# Altium PCB Sensei Control Board.PcbDoc (part 1 of 2)
Units mil, origin at the board's own origin, x right, y up, seen from the top; angles counter-clockwise.
Board outline 2310 x 2685 mil, 4 copper layers (Top Layer, Int1 (GND), Int2 (PWR), Bottom Layer), stack 61.811 mil thick; 49 components, 37 nets, 153 pads, 35 vias.
Unrouted connection lines stored in the file: 1.
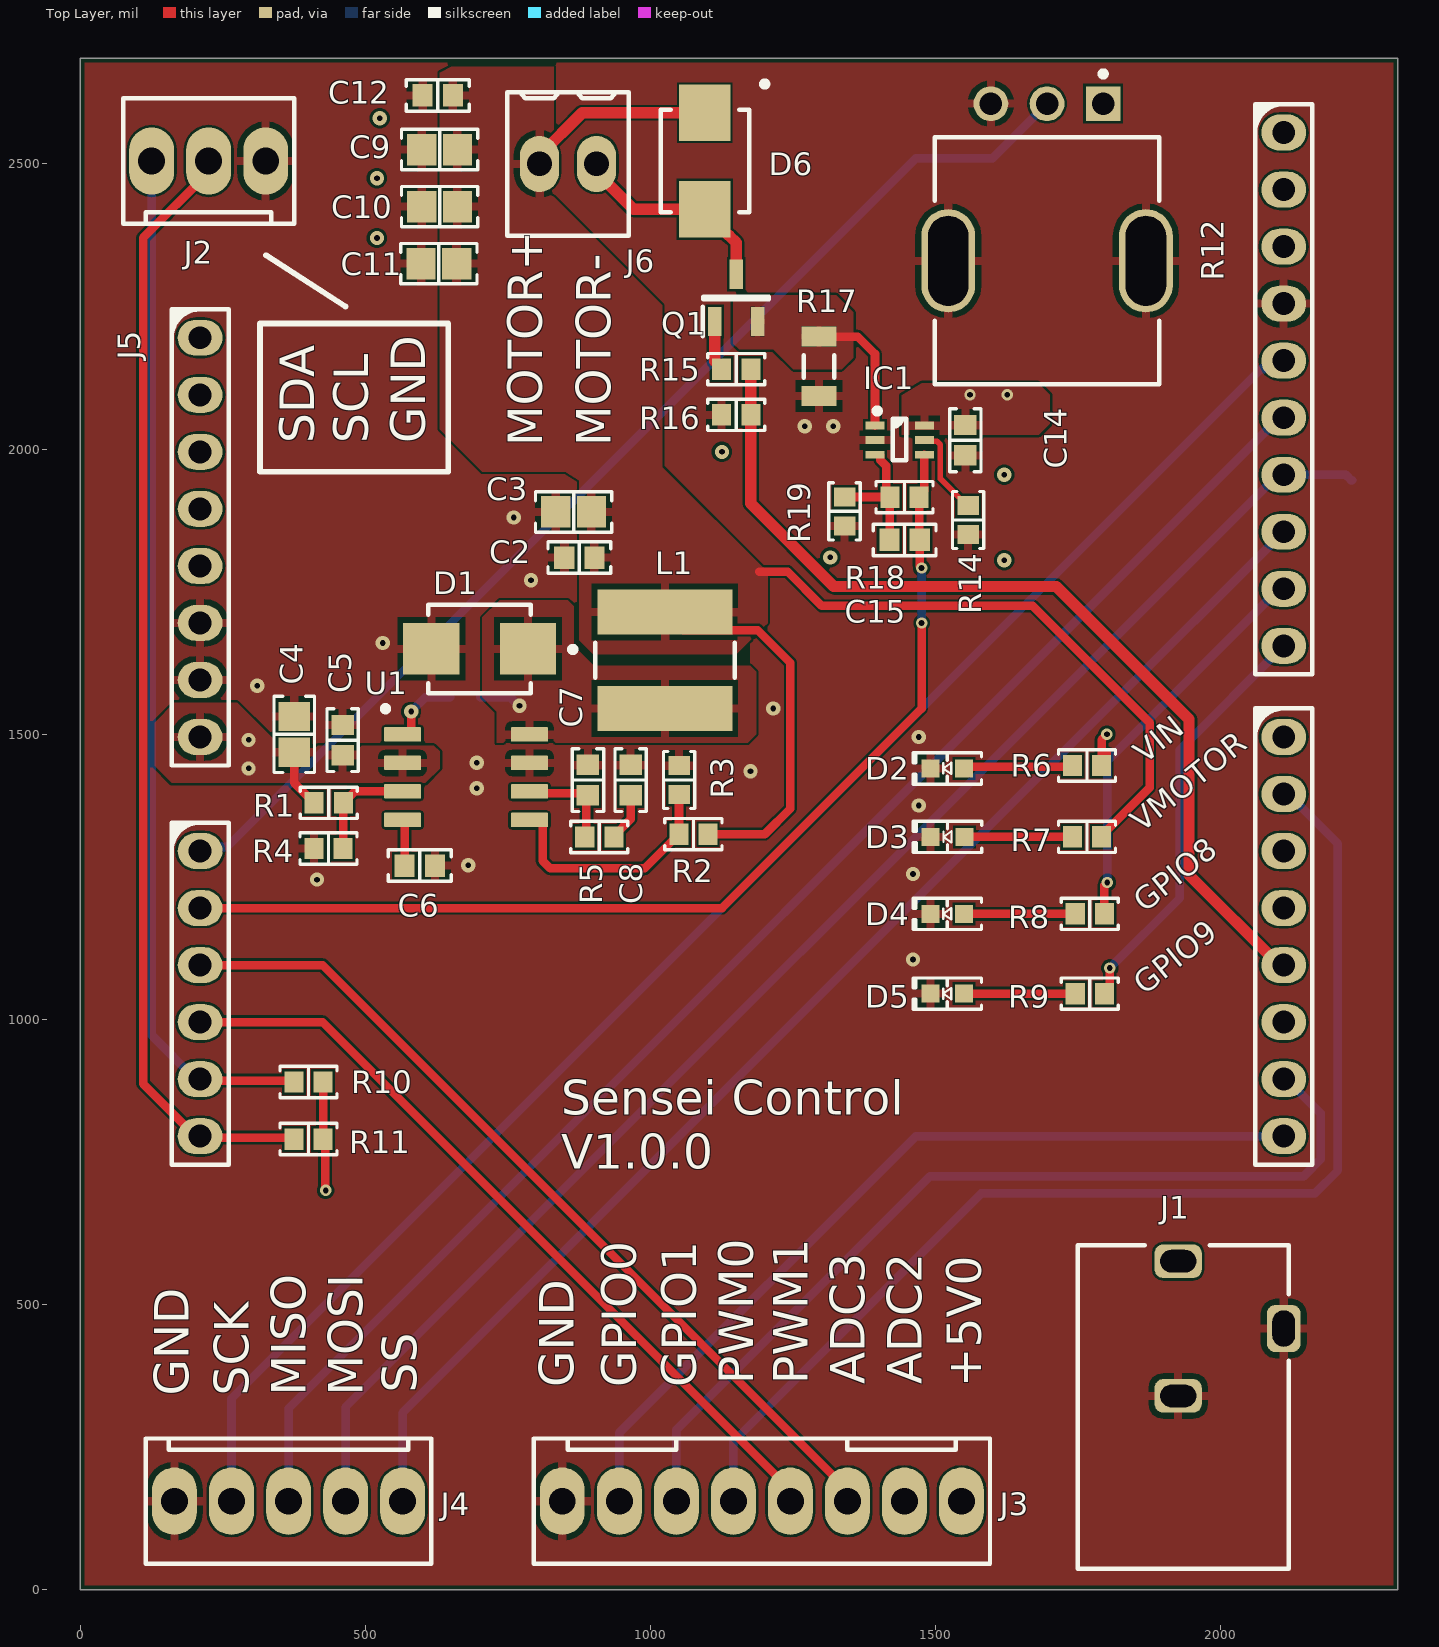
[diagram p0: Top Layer view]
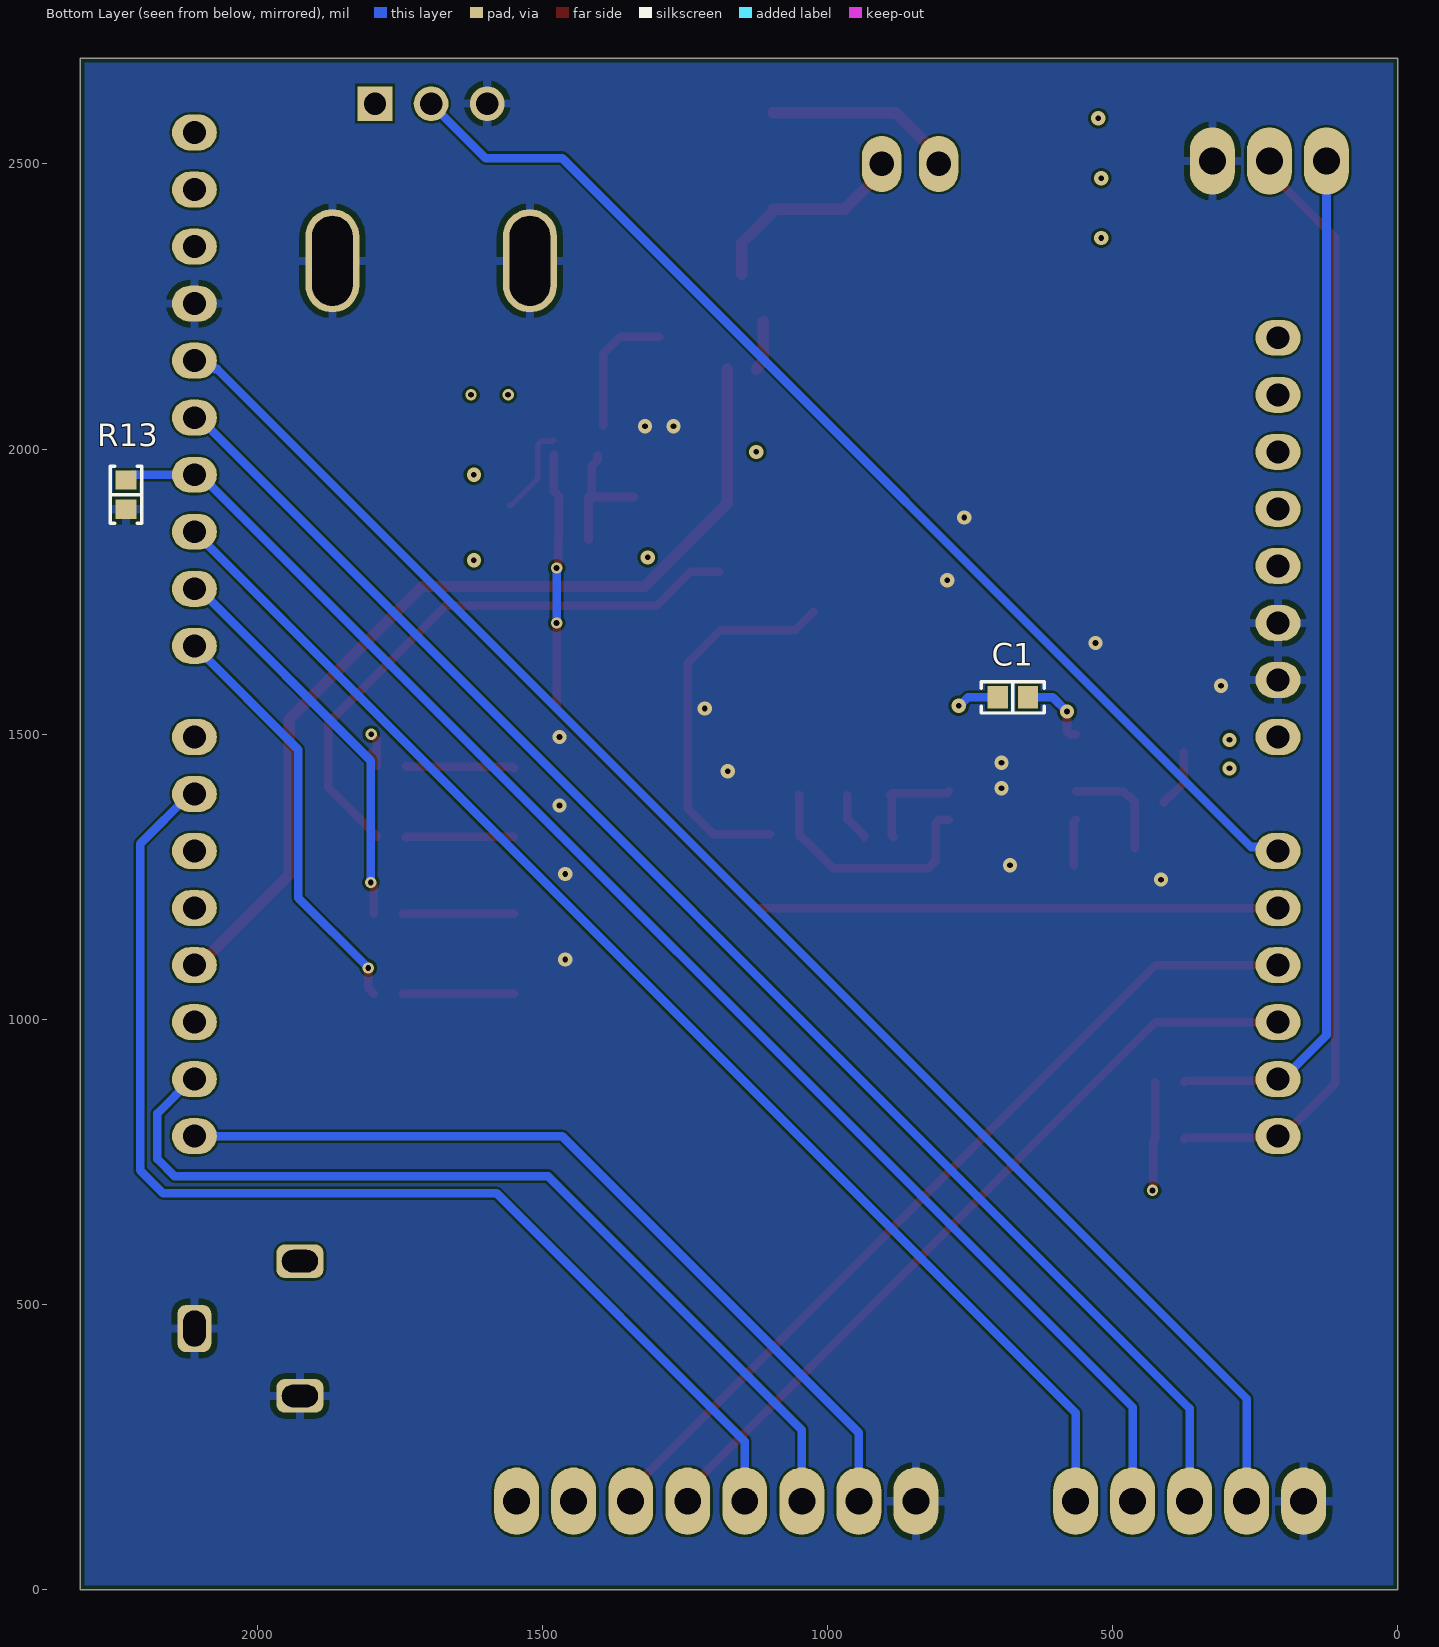
[diagram p1: Bottom Layer view, seen from below]
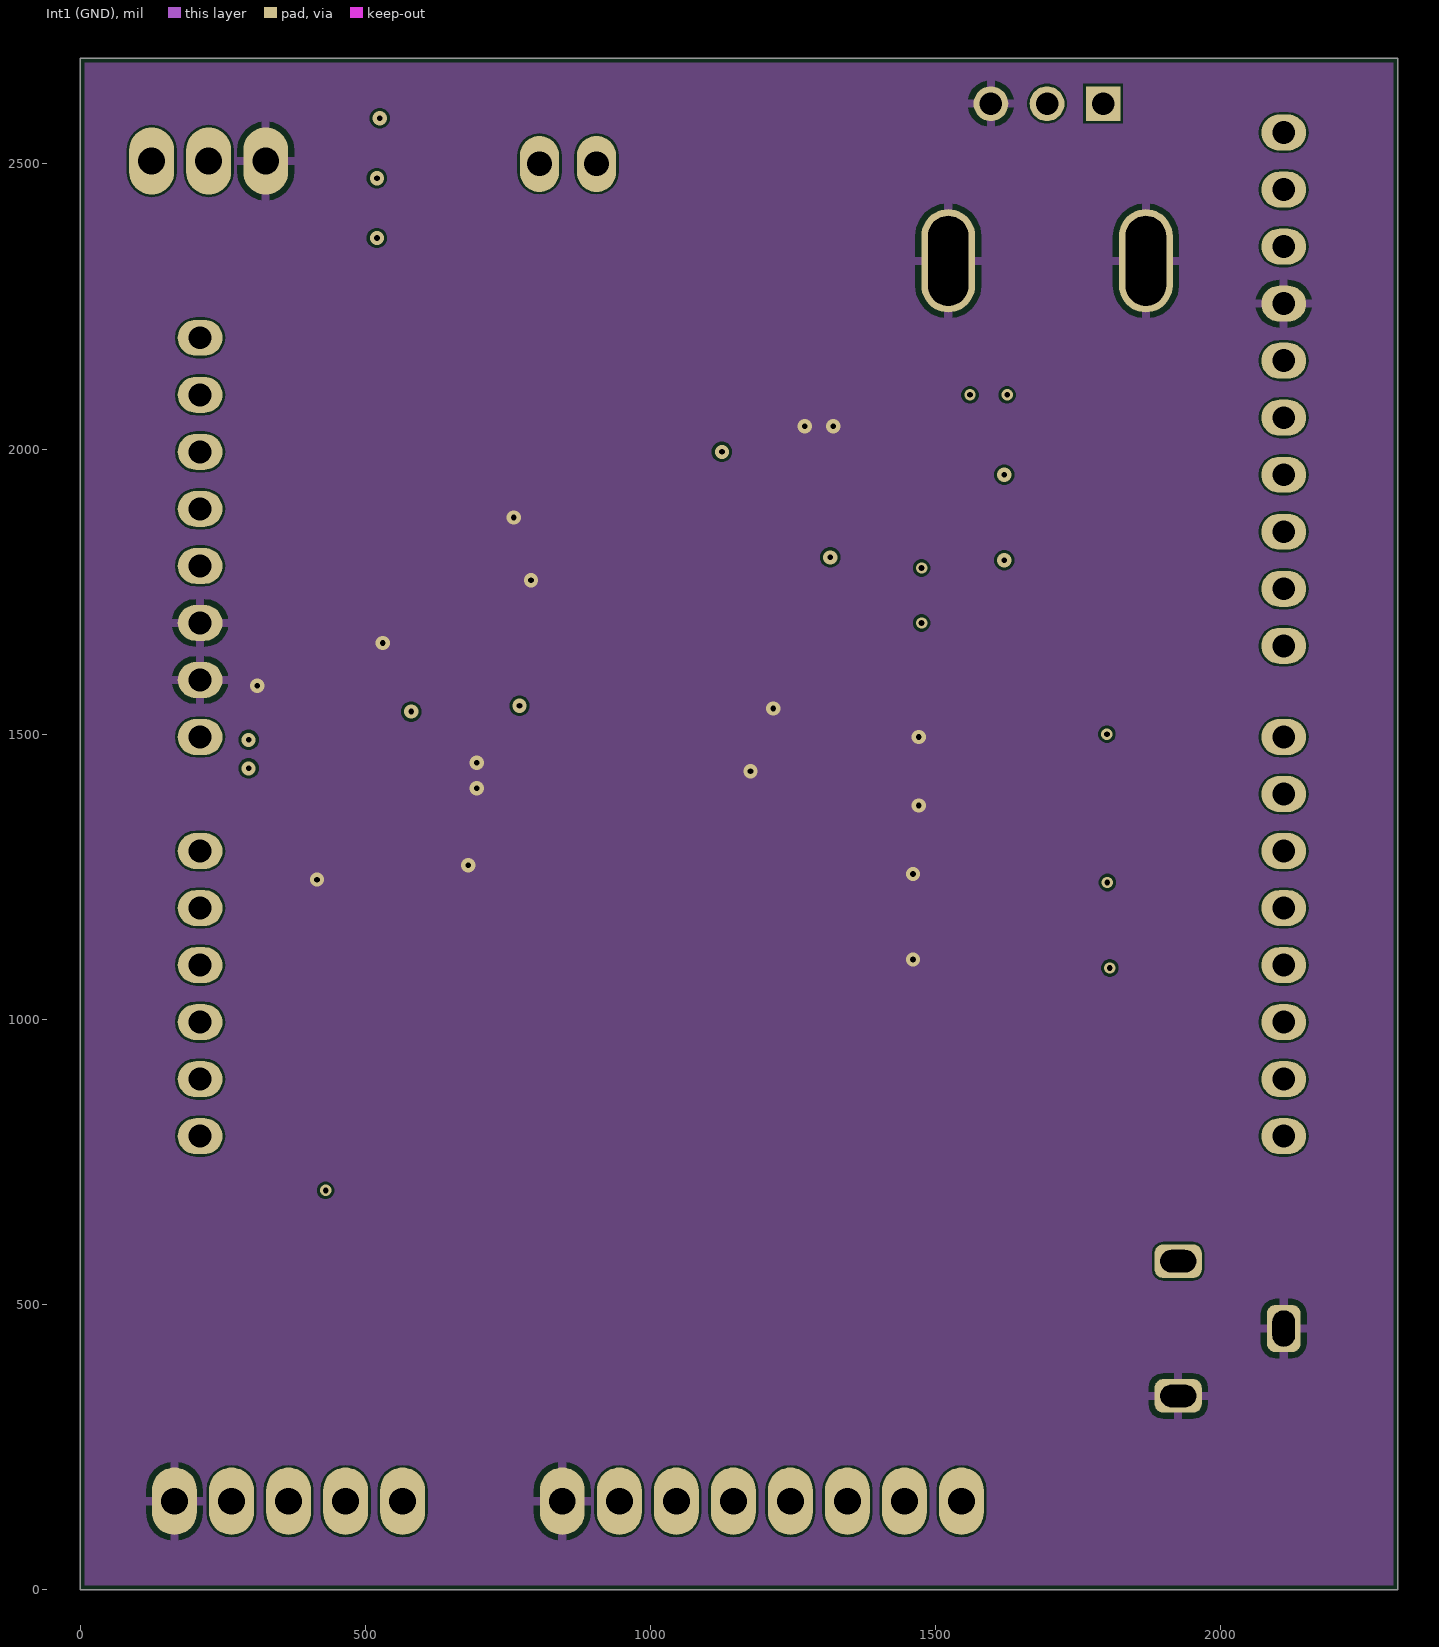
[diagram p2: Int1 (GND)]
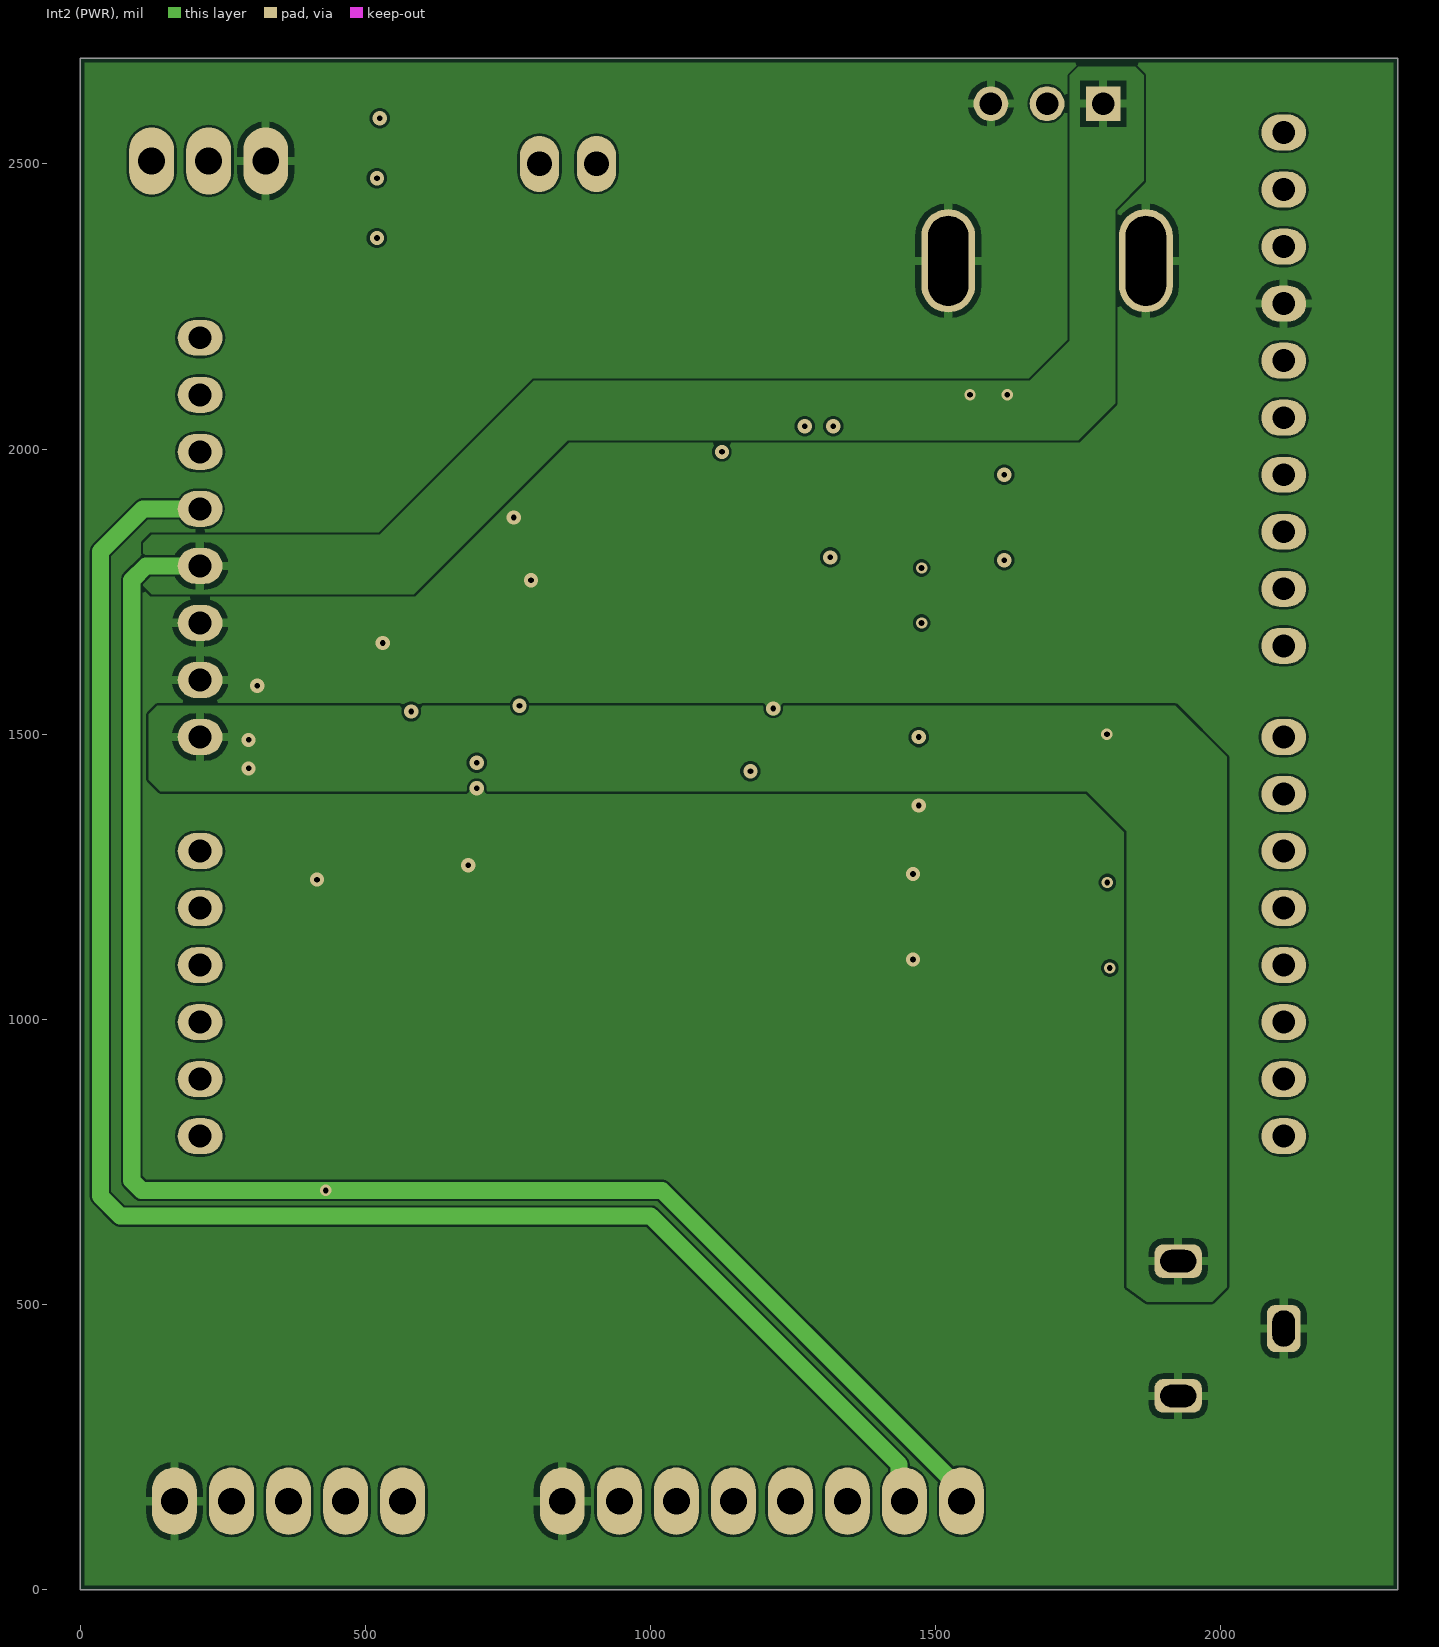
[diagram p3: Int2 (PWR)]

## Layer stack, top to bottom
Top Solder: solder mask 0.5, SM-001, Dk 3.8
Top Layer: signal copper 1.378
Dielectric 1: prepreg 3.937, 2313, Dk 4.05
Int1 (GND): signal copper 0.689
Dielectric 3: core 49.803, FR-4, Dk 4.5
Int2 (PWR): signal copper 0.689
Dielectric 5: prepreg 3.937, 2313, Dk 4.05
Bottom Layer: signal copper 1.378
Bottom Solder: solder mask 0.5, SM-001, Dk 3.8

## Board outline
0,0 2310,0 2310,2685 0,2685

## Design rules (kind name [scope] priority, off if disabled: settings)
BoardOutlineClearance [All] p1: gap=7.87 ignorepadtopadclearanceinfootprint=FALSE
Clearance [All] p1: gap=4 ignorepadtopadclearanceinfootprint=FALSE except(5: Arc-Via Track-Via SMDPad-Via THPad-Via Via-Via Via-Fill Via-Poly Via-Region Via-Text; 9.84: Arc-Hole Track-Hole SMDPad-Hole THPad-Hole Via-Hole Fill-Hole Poly-Hole Region-Hole Text-Hole)
ComponentClearance [All] p1: gap=4 collisioncheckmode=3 verticalgap=4 showdistances=TRUE
DiffPairsRouting [All] p1: maxlimit=4 minlimit=4 mostfreqgap=4 toplayer_minwidth=4 toplayer_maxwidth=71497.94 toplayer_prefwidth=4 midlayer1_minwidth=4 midlayer1_maxwidth=71497.94 midlayer1_prefwidth=4 midlayer2_minwidth=4 midlayer2_maxwidth=71497.94 midlayer2_prefwidth=4 bottomlayer_minwidth=4 bottomlayer_maxwidth=71497.94 bottomlayer_prefwidth=4 maxuncoupledlength=500
Height [All] p1: minheight=0 maxheight=71497.94 prefheight=500
HoleSize [All] p1: absolutevalues=TRUE maxlimit=248.03 minlimit=7.87 maxpercent=80.000 minpercent=20.000
HoleToHoleClearance [All] p1: gap=9.84 allowstackedmicrovias=FALSE
MinimumAnnularRing [All] p1: minimumring=3
MinimumSolderMaskSliver [All] p1: minsoldermaskwidth=0
PlaneClearance [All] p1: clearance=6
PlaneConnect [All] p1: pad.planeconnectstyle=Relief pad.reliefexpansion=11.81 pad.reliefentries=4 pad.reliefconductorwidth=4 pad.reliefairgap=4 via.planeconnectstyle=Direct via.reliefexpansion=11.81 via.reliefentries=4 via.reliefconductorwidth=5 via.reliefairgap=5
PolygonConnect PolygonConnectPowerPads [InNetClass('Power')] p1: thpad.connectstyle=Relief thpad.reliefconductorwidth=15 thpad.reliefentries=4 thpad.polygonreliefangle="90 Angle" thpad.airgapwidth=10 smdpad.connectstyle=Relief smdpad.reliefconductorwidth=15 smdpad.reliefentries=4 smdpad.polygonreliefangle="90 Angle" smdpad.airgapwidth=10 via.connectstyle=Direct via.reliefconductorwidth=10 via.reliefentries=4 via.polygonreliefangle="90 Angle" via.airgapwidth=10
RoutingVias "Power Vias" [InNetClass('Power')] p1: holewidth=10 width=20 viastyle="Through Hole" minholewidth=8 minwidth=20 maxholewidth=15 maxwidth=30
RoutingVias RoutingVias_1 [All] p2: holewidth=7 width=15 viastyle="Through Hole" minholewidth=4 minwidth=8 maxholewidth=10 maxwidth=20
SilkToSilkClearance [All] p1: silktosilkclearance=0
SilkToSolderMaskClearance [IsPad] p1: minsilkscreentomaskgap=2.9 clearancetoexposedcopper=TRUE
SolderMaskExpansion [All] p1: expansion=2.95 istentingtop=FALSE
Width Width_1 [All] p1: maxlimit=30 minlimit=10 preferedwidth=10
Width "Power Routes" [InNetClass('Power')] p2: maxlimit=20 minlimit=4 preferedwidth=15 midlayer1_prefwidth=4 midlayer2_prefwidth=4 minimp=50.000000 maximp=50.000000 favimp=50.000000
20 further rules are at their usual default settings.

## Classes and differential pairs
net class Power: 3V3 5V0 BOOT GND V_MOTOR V_SW VIN
component class Power: C1 C2 C3 C4 C5 C6 C7 C8 D1 J1 L1 R1 R2 R3 R4 R5 U1
component class MotorDriver: C9 C10 C11 C12 C14 C15 D6 IC1 J6 Q1 R14 R15 R16 R17 R18 R19
component class IO: D2 D3 D4 D5 J2 J3 J4 J5 P2 P3 P4 R6 R7 R8 R9 R10 R11 R12 R13

## Components (designator, comment, footprint, x,y, rotation, side; value= is the part's Value field where it differs from the comment)
C1 "0.1µF" "CAP 0603_1608" 675,1564.65 r180 bottom
C2 "0.1µF" "CAP 0603_1608" 875,1809.65 r0 top
C3 "10µF" "CAP 0805_2012" 865,1889.65 r0 top
C4 "22µF" "CAP 0805_2012" 375,1499.65 r270 top
C5 "0.1µF" "CAP 0603_1608" 460,1489.65 r270 top
C6 "8200pF" "CAP 0603_1608" 595,1269.65 r180 top
C7 "6800pF" "CAP 0603_1608" 890,1419.65 r270 top
C8 "2200pF" "CAP 0603_1608" 965,1419.65 r270 top
C9 "10µF" "CAP 0805_2012" 630,2525 r0 top
C10 "10µF" "CAP 0805_2012" 630,2425 r0 top
C11 "1µF" "CAP 0805_2012" 628.5,2325 r0 top
C12 "0.1µF" "CAP 0603_1608" 626.57,2620 r0 top
C14 "0.1µF" "CAP 0603_1608" 1551.69,2015.59 r90 top
C15 "100pF" "CAP 0603_1608" 1445.12,1840.59 r0 top
D1 "B240-13-F" FP-SMB-MFG 700,1649.65 r180 top value=200pF
D2 "Red" "LED 0603_1608 RED" 1520,1440 r180 top
D3 "Red" "LED 0603_1608 RED" 1520.47,1320 r180 top
D4 "RED" "LED 0603_1608 RED" 1520,1185 r180 top value=Red
D5 "Red" "LED 0603_1608 RED" 1520,1045 r180 top
D6 "B240-13-F" FP-SMB-MFG 1095,2505 r270 top value=200pF
IC1 "LMV601MG/NOPB" "TI SC70-6 DCK" 1436.69,2015.59 r0 top
J1 "PJ-102AH" "CUI PJ-102AH" 1925,320 r180 top
J2 "0022272031" "MOLEX KK 0022272031" 225,2505 r0 top locked
J3 "0022272081" "MOLEX KK 0022272081" 1195,155 r180 top locked
J4 "0022272051" "MOLEX KK 0022272051" 365,155 r180 top locked
J5 "920-0088-01" "SCHMARTBOARD - 920-0088-01" 1160,1675 r0 top locked
J6 "282834-2" "TE 282834-2" 855,2500 r0 top locked
L1 "SRN6045-150M" FP-SRN6045-MFG 1025,1629.65 r90 top
Q1 "IRLML6246TRPBF" SOT95P237X112-3N 1150,2265 r90 top
R1 "169 kΩ" "RES 0603_1608" 435.59,1379.65 r180 top value="169 kOhms"
R2 "10.2 kΩ" "RES 0603_1608" 1075,1324.65 r0 top value="10.2 kOhms"
R3 "1.58 kΩ" "RES 0603_1608" 1050,1419.65 r270 top value="1.58 kOhms"
R4 "51 kΩ" "RES 0603_1608" 435,1299.65 r0 top value="51 kOhms"
R5 "30.9 kΩ" "RES 0603_1608" 910,1319.65 r180 top value="30.9 kOhms"
R6 "820 Ω" "RES 0603_1608" 1765,1445 r180 top value="820 Ohms"
R7 "390 Ω" "RES 0603_1608" 1765,1320 r180 top value="390 Ohms"
R8 "330 Ω" "RES 0603_1608" 1770,1185 r180 top value="330 Ohms"
R9 "330 Ω" "RES 0603_1608" 1770,1045 r180 top value="330 Ohms"
R10 "10 kΩ" "RES 0603_1608" 400,890 r180 top value="10 kOhms"
R11 "10 kΩ" "RES 0603_1608" 400,790 r180 top value="10 kOhms"
R12 "PTV09A-4020U-B103" FP-PTV09A-4-MFG 1695,2330 r180 top value=10kΩ
R13 "100 kΩ" "RES 0603_1608" 2230,1920 r270 bottom value="100 kOhms"
R14 "0 Ω" "RES 0603_1608" 1556.69,1875.59 r270 top value="0 Ohms"
R15 "10 Ω" "RES 0603_1608" 1150,2140 r180 top value="10 Ohms"
R16 "100 kΩ" "RES 0603_1608" 1150,2060 r0 top value="100 kOhms"
R17 "100mΩ" RESC3216X70X50LL05T20 1295,2145 r90 top
R18 "360 kΩ" "RES 0603_1608" 1445.12,1915.59 r0 top value="360 kOhms"
R19 "4.3 kΩ" "RES 0603_1608" 1340.12,1890.59 r270 top value="4.3 kOhms"
U1 "TPS54232DR" D0008A_M 676.22,1424.65 r0 top

## Footprints (in the part's own frame and the unit in brackets; to place one, negate y for a bottom-side part, rotate by r counter-clockwise, add the part's x,y. Pads: shape width x height; smd on the part's side, far side on the other; paste and mask are expansions set on the pad)
"CAP 0603_1608" [mm] "Chip Capacitor, 2-Leads, Body 1.60x0.80mm, IPC Medium Density"
  rect 0.9x1 smd: 1(-0.675,0) 2(0.675,0)
  silkscreen extent -1.4,-0.7 1.4,0.7, body extent -0.8,-0.41 0.8,0.41, height 0.82
"CAP 0805_2012" [mm] "Chip Capacitor, 2-Leads, Body 2.00x1.20mm, IPC Medium Density"
  rect 1.3x1.4 smd: 1(-0.8,0) 2(0.8,0)
  silkscreen extent -1.7,-0.9 1.7,0.9, body extent -1,-0.64 1,0.64, height 1.26
"CUI PJ-102AH" [mm] "DC Barrel Jack W/ Switch 2.0x5.5"
  rrect50% 2.1x1.5 hole 1 slot 1.6 at 0 deg: 1(0,-6.5) 2(0,-0.5)
  rrect50% 1.5x2.1 hole 1 slot 1.6 at 90 deg: 3(-4.7,-3.5)
  silkscreen extent -4.92,-7.2 4.47,7.2, body extent -4.92,-7.2 4.47,7.2, height 11
D0008A_M [mm] "SOIC, 8-Leads, Body 5x4mm, Pitch 1.27mm, IPC Low Density"
  rrect15% 1.65x0.65 smd: 1(-2.825,1.905) 2(-2.825,0.635) 3(-2.825,-0.635) 4(-2.825,-1.905) 5(2.825,-1.905) 6(2.825,-0.635) 7(2.825,0.635) 8(2.825,1.905)
  silkscreen extent -3.71,2.92 -3.46,3.17, body extent -3,-2.45 3,2.45, height 1.63
FP-PTV09A-4-MFG [mm]
  rect 1.55x1.55 hole 1 paste-1000 mask+0: 1(-2.5,-7)
  round 1.55 hole 1 paste-1000 mask+0: 2(0,-7) 3(2.5,-7)
  rrect100% 2.4x4.6 hole 4 slot 1.8 at 0 deg paste-1000 mask+0: 4(-4.4,0) 5(4.4,0)
  silkscreen extent -5,-8.45 5,5.5, body extent -5.8,-7.88 5.8,5.6, height 0.25
FP-SMB-MFG [mm]
  rect 2.5x2.3 smd paste+0 mask+0: 1(-2.15,0) 2(2.15,0)
  silkscreen extent -4.28,-1.97 2.28,1.97, body extent -3.5,-2.07 3.5,2.07, height 0.25
FP-SRN6045-MFG [mm]
  rect 2x6 smd paste+0 mask+0: 1(-2.15,0) 2(2.15,0)
  silkscreen extent -0.77,-3.1 0.77,3.1, body extent -3.25,-3.2 3.25,3.2, height 0.25
"LED 0603_1608 RED" [mm] "Chip Diode, 2-Leads, Body 1.60x0.80mm, IPC Medium Density"
  rect 0.8x0.8 smd: 1(-0.75,0) 2(0.75,0)
  silkscreen extent -1.52,-0.7 1.52,0.7, body extent -0.8,-0.4 0.8,0.4, height 0.53
"MOLEX KK 0022272031" [mm]
  oval 2x3 hole 1.2: 1(-2.54,0) 2(0,0) 3(2.54,0)
  silkscreen extent -3.81,-2.79 3.81,2.79, body extent -3.81,-2.9 3.81,2.9, height 11.7
"MOLEX KK 0022272051" [mm]
  oval 2x3 hole 1.2: 1(-5.08,0) 2(-2.54,0) 3(0,0) 4(2.54,0) 5(5.08,0)
  silkscreen extent -6.35,-2.79 6.35,2.79, body extent -6.35,-2.9 6.35,2.9, height 11.7
"MOLEX KK 0022272081" [mm]
  oval 2x3 hole 1.2: 1(-8.89,0) 2(-6.35,0) 3(-3.81,0) 4(-1.27,0) 5(1.27,0) 6(3.81,0) 7(6.35,0) 8(8.89,0)
  silkscreen extent -10.16,-2.79 10.16,2.79, body extent -10.16,-2.9 10.16,2.9, height 11.7
"RES 0603_1608" [mm] "Chip Resistor, 2-Leads, Body 1.60x0.80mm, IPC Medium Density"
  rect 0.85x0.95 smd: 1(-0.65,0) 2(0.65,0)
  silkscreen extent -1.27,-0.7 1.27,0.7, body extent -0.8,-0.4 0.8,0.4, height 0.45
RESC3216X70X50LL05T20 [mm] "Chip Resistor, 2-Leads, Body 3.20x1.60mm, IPC High Density"
  rect 0.9x1.55 smd: 1(-1.325,0) 2(1.325,0)
  silkscreen extent -0.5,-0.67 0.5,0.67, body extent -1.63,-0.82 1.62,0.82, height 0.7
"SCHMARTBOARD - 920-0088-01" [mm] "Arduino pin header set"
  oval 2x1.6 hole 1.02: 1(-24.13,13.21) 2(-24.13,10.67) 3(-24.13,8.13) 4(-24.13,5.59) 5(-24.13,3.05) 6(-24.13,0.51) 7(-24.13,-2.03) 8(-24.13,-4.57) 9(-24.13,-9.65) 10(-24.13,-12.19) 11(-24.13,-14.73) 12(-24.13,-17.27) 13(-24.13,-19.81) 14(-24.13,-22.35) 15(24.13,-22.35) 16(24.13,-19.81) 17(24.13,-17.27) 18(24.13,-14.73) 19(24.13,-12.19) 20(24.13,-9.65) 21(24.13,-7.11) 22(24.13,-4.57) 23(24.13,-0.51) 24(24.13,2.03) 25(24.13,4.57) 26(24.13,7.11) 27(24.13,9.65) 28(24.13,12.19) 29(24.13,14.73) 30(24.13,17.27) 31(24.13,19.81) 32(24.13,22.35)
  silkscreen extent -25.4,-23.62 25.4,23.62, body extent -25.4,-23.62 25.4,23.62, height 8.5
SOT95P237X112-3N [mm]
  rect 1.3x0.6 smd: 1(-1.05,0.95) 2(-1.05,-0.95) 3(1.05,0)
  silkscreen extent -1.7,-1.46 0.05,1.5, body extent -1.18,-1.46 1.18,1.46, height 1.12
"TE 282834-2" [mm]
  oval 1.75x2.5 hole 1.1: 1(-1.27,0) 2(1.27,0)
  silkscreen extent -2.7,-3.2 2.7,3.2, body extent -2.77,-3.25 2.77,3.25, height 10
"TI SC70-6 DCK" [mm] "SC70, 6-Leads, Body 2.00x2.10mm, Pitch 0.65mm, IPC Medium Density"
  rect 0.85x0.35 smd: 1(-1.1,0.65) 2(-1.1,0) 3(-1.1,-0.65) 4(1.1,-0.65) 5(1.1,0) 6(1.1,0.65)
  silkscreen extent -1.12,-0.9 0.3,1.42, body extent -1.06,-1 1.06,1, height 1.1

## Part data
C1 C2 C5 C12 C14: library part 06033C104JAT2A, "CAP CER 0.1UF 25V X7R 0603", Device Package="0603 (1608 Metric)", Manufacturer="AVX Corporation", Operating Temperature="-55°C ~ 125°C", Supplier Part Number 1=478-3713-1-ND, Temperature Coefficient=X7R, Tolerance=±5%, Voltage - Rated=25V, Applications="General Purpose", Capacitance=0.1µF, ComponentLink1Description=Datasheet, ComponentLink1URL=http://datasheets.avx.com/X7RDielectric.pdf, ComponentLink2Description="DigiKey Link", ComponentLink2URL=http://digikey.com/product-detail/en/avx-corporation/06033C104JAT2A/478-3713-1-ND/1116411, LastUpdated="2/3/2020 5:05:47 PM", Lifecycle Status=Active, Minimum Order=1, Mounting Type="Surface Mount, MLCC", Package / Case="0603 (1608 Metric)", Packaging=TapeAndReel, Part Number=06033C104JAT2A, Part Status=Active, Price=0.07, Series=-, Size / Dimension="0.063\" L x 0.032\" W (1.60mm x 0.81mm)", Supplier 1=DigiKey, Thickness (Max)="0.035\" (0.90mm)"
C3 C9 C10: library part 08053D106KAT2A, "CAP CER 10UF 25V X5R 0805", Device Package="0805 (2012 Metric)", Manufacturer="AVX Corporation", Operating Temperature="-55°C ~ 85°C", Supplier Part Number 1=478-7436-1-ND, Temperature Coefficient=X5R, Tolerance=±10%, Voltage - Rated=25V, Applications="General Purpose", Capacitance=10µF, ComponentLink1Description=Datasheet, ComponentLink1URL=http://datasheets.avx.com/cx5r.pdf, ComponentLink2Description="DigiKey Link", ComponentLink2URL=http://digikey.com/product-detail/en/avx-corporation/08053D106KAT2A/478-7436-1-ND/3660337, LastUpdated="2/3/2020 5:07:41 PM", Lifecycle Status=Active, Minimum Order=1, Mounting Type="Surface Mount, MLCC", Package / Case="0805 (2012 Metric)", Packaging=TapeAndReel, Part Number=08053D106KAT2A, Part Status=Active, Price=0.13, Series=-, Size / Dimension="0.079\" L x 0.049\" W (2.00mm x 1.25mm)", Supplier 1=DigiKey, Thickness (Max)="0.051\" (1.30mm)"
C4: library part C2012X5R1E226M125AC, "CAP CER 22UF 25V X5R 0805", Device Package="0805 (2012 Metric)", Manufacturer="TDK Corporation", Operating Temperature="-55°C ~ 85°C", Supplier Part Number 1=445-9112-1-ND, Temperature Coefficient=X5R, Tolerance=±20%, Voltage - Rated=25V, Applications="General Purpose", Capacitance=22µF, ComponentLink1Description=Datasheet, ComponentLink1URL=https://product.tdk.com/info/en/catalog/datasheets/mlcc_commercial_general_en.pdf?ref_disty=digikey, ComponentLink2Description="DigiKey Link", ComponentLink2URL=http://digikey.com/product-detail/en/tdk-corporation/C2012X5R1E226M125AC/445-9112-1-ND/3661660, Features="Low ESL", LastUpdated="2/3/2020 5:06:58 PM", Lifecycle Status=Active, Minimum Order=1, Mounting Type="Surface Mount, MLCC", Package / Case="0805 (2012 Metric)", Packaging=TapeAndReel, Part Number=C2012X5R1E226M125AC, Part Status=Active, Price=1.18, Series=C, Size / Dimension="0.079\" L x 0.049\" W (2.00mm x 1.25mm)", Supplier 1=DigiKey, Thickness (Max)="0.057\" (1.45mm)"
C6: library part 06035C822KAT2A, "CAP CER 8200PF 50V X7R 0603", Device Package="0603 (1608 Metric)", Manufacturer="AVX Corporation", Operating Temperature="-55°C ~ 125°C", Supplier Part Number 1=478-1226-1-ND, Temperature Coefficient=X7R, Tolerance=±10%, Voltage - Rated=50V, Applications="General Purpose", Capacitance=8200pF, ComponentLink1Description=Datasheet, ComponentLink1URL=http://datasheets.avx.com/X7RDielectric.pdf, ComponentLink2Description="DigiKey Link", ComponentLink2URL=http://digikey.com/product-detail/en/avx-corporation/06035C822KAT2A/478-1226-1-ND/564258, LastUpdated="2/3/2020 5:05:05 PM", Lifecycle Status=Active, Minimum Order=1, Mounting Type="Surface Mount, MLCC", Package / Case="0603 (1608 Metric)", Packaging=TapeAndReel, Part Number=06035C822KAT2A, Part Status=Active, Price=0.02, Series=-, Size / Dimension="0.063\" L x 0.032\" W (1.60mm x 0.81mm)", Supplier 1=DigiKey, Thickness (Max)="0.035\" (0.90mm)"
C7: library part 06033C682JAT2A, "CAP CER 6800PF 25V X7R 0603", Device Package="0603 (1608 Metric)", Manufacturer="AVX Corporation", Operating Temperature="-55°C ~ 125°C", Supplier Part Number 1=478-12687-1-ND, Temperature Coefficient=X7R, Tolerance=±5%, Voltage - Rated=25V, Applications="General Purpose", Capacitance=6800pF, ComponentLink1Description=Datasheet, ComponentLink1URL=http://datasheets.avx.com/X7RDielectric.pdf, ComponentLink2Description="DigiKey Link", ComponentLink2URL=http://digikey.com/product-detail/en/avx-corporation/06033C682JAT2A/478-12687-1-ND/9949222, LastUpdated="2/3/2020 5:06:06 PM", Lifecycle Status=Active, Minimum Order=1, Mounting Type="Surface Mount, MLCC", Package / Case="0603 (1608 Metric)", Packaging=TapeAndReel, Part Number=06033C682JAT2A, Part Status=Active, Price=0.05, Series=-, Size / Dimension="0.063\" L x 0.032\" W (1.60mm x 0.81mm)", Supplier 1=DigiKey, Thickness (Max)="0.035\" (0.90mm)"
C8: library part 06033C222JAT2A, "CAP CER 2200PF 25V X7R 0603", Device Package="0603 (1608 Metric)", Manufacturer="AVX Corporation", Operating Temperature="-55°C ~ 125°C", Supplier Part Number 1=478-12683-1-ND, Temperature Coefficient=X7R, Tolerance=±5%, Voltage - Rated=25V, Applications="General Purpose", Capacitance=2200pF, ComponentLink1Description=Datasheet, ComponentLink1URL=http://datasheets.avx.com/X7RDielectric.pdf, ComponentLink2Description="DigiKey Link", ComponentLink2URL=http://digikey.com/product-detail/en/avx-corporation/06033C222JAT2A/478-12683-1-ND/9949218, LastUpdated="2/3/2020 5:05:43 PM", Lifecycle Status=Active, Minimum Order=1, Mounting Type="Surface Mount, MLCC", Package / Case="0603 (1608 Metric)", Packaging=TapeAndReel, Part Number=06033C222JAT2A, Part Status=Active, Price=0.01, Series=-, Size / Dimension="0.063\" L x 0.032\" W (1.60mm x 0.81mm)", Supplier 1=DigiKey, Thickness (Max)="0.035\" (0.90mm)"
C11: library part 08053C105JAT2A, "CAP CER 1UF 25V X7R 0805", Device Package="0805 (2012 Metric)", Manufacturer="AVX Corporation", Operating Temperature="-55°C ~ 125°C", Supplier Part Number 1=478-10487-1-ND, Temperature Coefficient=X7R, Tolerance=±5%, Voltage - Rated=25V, Applications="General Purpose", Capacitance=1µF, ComponentLink1Description=Datasheet, ComponentLink1URL=http://datasheets.avx.com/X7RDielectric.pdf, ComponentLink2Description="DigiKey Link", ComponentLink2URL=http://digikey.com/product-detail/en/avx-corporation/08053C105JAT2A/478-10487-1-ND/6797628, LastUpdated="2/3/2020 5:07:31 PM", Lifecycle Status=Active, Minimum Order=1, Mounting Type="Surface Mount, MLCC", Package / Case="0805 (2012 Metric)", Packaging=TapeAndReel, Part Number=08053C105JAT2A, Part Status=Active, Price=0.09, Series=-, Size / Dimension="0.079\" L x 0.049\" W (2.01mm x 1.25mm)", Supplier 1=DigiKey, Thickness (Max)="0.037\" (0.94mm)"
C15: library part 06033A101KAT2A, "CAP CER 100PF 25V C0G/NP0 0603", Device Package="0603 (1608 Metric)", Manufacturer="AVX Corporation", Operating Temperature="-55°C ~ 125°C", Supplier Part Number 1=478-7895-1-ND, Temperature Coefficient="C0G, NP0", Tolerance=±10%, Voltage - Rated=25V, Applications="General Purpose", Capacitance=100pF, ComponentLink1Description=Datasheet, ComponentLink1URL=http://datasheets.avx.com/C0GNP0-Dielectric.pdf, ComponentLink2Description="DigiKey Link", ComponentLink2URL=http://digikey.com/product-detail/en/avx-corporation/06033A101KAT2A/478-7895-1-ND/3881518, LastUpdated="2/3/2020 5:05:19 PM", Lifecycle Status=Active, Minimum Order=1, Mounting Type="Surface Mount, MLCC", Package / Case="0603 (1608 Metric)", Packaging=TapeAndReel, Part Number=06033A101KAT2A, Part Status=Active, Price=0.04, Series=-, Size / Dimension="0.063\" L x 0.032\" W (1.60mm x 0.81mm)", Supplier 1=DigiKey, Thickness (Max)="0.035\" (0.90mm)"
D1 D6: library part CMP-12790-000044-1, "DIODE SCHOTTKY 40V 2A SMB", Capacitance=200pF, Forward Current=2A, Manufacturer="Diodes Inc.", Max Junction Temp=+150°C, Max Repetitive Reverse Voltage=40V, Max Surge Forward Current=50A, Package=SMB, Peak Reverse Current=0.5mA, Temperature="-65°C to +150°C", Temperature Range Low=-65°C, Automotive=No, Category=Diode, ComponentLink2Description=Datasheet, ComponentLink2URL=https://www.diodes.com/assets/Datasheets/ds13004.pdf, Device Class L1="Discrete Semiconductors", Device Class L2=Diodes, Device Class L3="Schottky Diodes", Digikey Description="DIODE SCHOTTKY 40V 2A SMB", Footprint Url=https://www.diodes.com/assets/Package-Files/SMB.pdf, Height=2.5mm, Lead Free=Yes, Manufacturer Part Number=B240-13-F, Mouser Description="Schottky Diodes & Rectifiers 40V 2A", Octopart=https://octopart.com/b240-13-f-diodes+inc.-325780, Reverse Voltage=40V, RoHS=TRUE, Standoff Height=0.05mm, Temperature Range High=+150°C
D2 D3 D5: library part 150060SS55040, "LED RED DIFFUSED 0603 SMD", Current - Test=20mA, Device Package="0603 (1608 Metric)", Lens Color=0.50mm, Manufacturer="Würth Elektronik", Millicandela Rating=70mcd, Supplier Part Number 1=732-12016-1-ND, Voltage - Forward (Vf) (Typ)=2V, Color=Red, ComponentLink1Description=Datasheet, ComponentLink1URL=https://www.we-online.de/web/en/index.php/download/media/07_electronic_components/download_center_1/application_notes_berichte/ano002_leds___the_future_of_horticultural_lighting/ANO002b_EN_LEDs_The_Future_of_Horticultural_Lighting.pdf, ComponentLink2Description="DigiKey Link", ComponentLink2URL=http://digikey.com/product-detail/en/w-rth-elektronik/150060SS55040/732-12016-1-ND/8557226, Configuration=Standard, Height (Max)=0.50mm, LastUpdated="2/3/2020 5:16:30 PM", Lens Size="1.00mm x 0.80mm", Lens Style="Rectangle with Flat Top", Lens Transparency=Diffused, Lifecycle Status=Active, Minimum Order=1, Mounting Type="Surface Mount", Package / Case="0603 (1608 Metric)", Packaging=TapeAndReel, Part Number=150060SS55040, Part Status=Active, Price=0.10, Series=WL-SMDC, Size / Dimension="1.60mm L x 0.80mm W", Supplier 1=DigiKey, Supplier Device Package="0603 (1608 Metric)", Viewing Angle=140°, Wavelength - Dominant=630nm, Wavelength - Peak=645nm
D4: library part 150060SS55040, "LED RED DIFFUSED 0603 SMD", Color=Red, Current - Test=20mA, Device Package="0603 (1608 Metric)", Lens Color=0.50mm, Manufacturer="Würth Elektronik", Millicandela Rating=70mcd, Supplier Part Number 1=732-12016-1-ND, Voltage - Forward (Vf) (Typ)=2V, ComponentLink1Description=Datasheet, ComponentLink1URL=https://www.we-online.de/web/en/index.php/download/media/07_electronic_components/download_center_1/application_notes_berichte/ano002_leds___the_future_of_horticultural_lighting/ANO002b_EN_LEDs_The_Future_of_Horticultural_Lighting.pdf, ComponentLink2Description="DigiKey Link", ComponentLink2URL=http://digikey.com/product-detail/en/w-rth-elektronik/150060SS55040/732-12016-1-ND/8557226, Configuration=Standard, Height (Max)=0.50mm, LastUpdated="2/3/2020 5:16:30 PM", Lens Size="1.00mm x 0.80mm", Lens Style="Rectangle with Flat Top", Lens Transparency=Diffused, Lifecycle Status=Active, Minimum Order=1, Mounting Type="Surface Mount", Package / Case="0603 (1608 Metric)", Packaging=TapeAndReel, Part Number=150060SS55040, Part Status=Active, Price=0.10, Series=WL-SMDC, Size / Dimension="1.60mm L x 0.80mm W", Supplier 1=DigiKey, Supplier Device Package="0603 (1608 Metric)", Viewing Angle=140°, Wavelength - Dominant=630nm, Wavelength - Peak=645nm
IC1: "IC OPAMP GP 1 CIRCUIT SC70-6", Current - Input Bias=0.02pA, Current - Output / Channel=113mA, Current - Supply=107µA, Device Package="6-TSSOP, SC-88, SOT-363", Manufacturer="Texas Instruments", Operating Temperature="-40°C ~ 125°C", Supplier Device Package=SC-70-6, Supplier Part Number 1=296-39050-1-ND, Voltage - Input Offset=250µV, Voltage - Supply, Single/Dual (±)="2.7V ~ 5.5V", Amplifier Type="General Purpose", ComponentLink1Description=Datasheet, ComponentLink1URL=http://www.ti.com/general/docs/suppproductinfo.tsp?distId=10&gotoUrl=http%3A%2F%2Fwww.ti.com%2Flit%2Fgpn%2Flmv601, ComponentLink2Description="DigiKey Link", ComponentLink2URL=http://digikey.com/product-detail/en/texas-instruments/LMV601MG-NOPB/296-39050-1-ND/5143087, Gain Bandwidth Product=1MHz, LastUpdated="2/3/2020 5:02:27 PM", Lifecycle Status=Active, Minimum Order=1, Mounting Type="Surface Mount", Number of Circuits=1, Output Type=Rail-to-Rail, Package / Case="6-TSSOP, SC-88, SOT-363", Packaging=ReReel, Part Number=LMV601MG/NOPB, Part Status=Active, Price=0.00, Series=-, Slew Rate=1V/µs, Supplier 1=DigiKey
J1: "CONN PWR JACK 2X5.5MM SOLDER", Current Rating (Amps)=5A, Manufacturer="CUI Devices", Material Flammability Rating="UL94 V-0", Supplier Part Number 1=CP-102AH-ND, Voltage - Rated=24VDC, Actual Diameter="0.079\" (2.00mm ID), 0.256\" (6.50mm OD)", ComponentLink1Description=Datasheet, ComponentLink1URL=https://www.cuidevices.com/product/resource/digikeypdf/pj-102ah.pdf, ComponentLink2Description="DigiKey Link", ComponentLink2URL=//digikey.com/product-detail/en/cui-devices/PJ-102AH/CP-102AH-ND/408448, Connector Type=Jack, Gender=Male, Industry Recognized Mating Diameter="2.00mm ID (0.079\"), 5.50mm OD (0.217\")", Internal Switch(s)="Single Switch, Normally Closed", LastUpdated="2/3/2020 5:11:42 PM", Lifecycle Status=0, Mating Length/Depth="0.354\" (9.00mm)", Minimum Order=1, Mounting Type="Through Hole, Right Angle", Number of Positions/Contacts="2 Conductors, 3 Contacts", Packaging=Tray, Part Number=PJ-102AH, Part Status=Active, Price=0.76, Series=-, Shielding=Unshielded, Supplier 1=DigiKey, Termination=Solder
J2: "CONN HEADER VERT 3POS 2.54MM", Insulation Color=Natural, Manufacturer=Molex, Material Flammability Rating="UL94 V-0", Supplier Part Number 1=WM4112-ND, ComponentLink1Description=Datasheet, ComponentLink1URL=https://www.molex.com/pdm_docs/sd/022272031_sd.pdf, ComponentLink2Description="DigiKey Link", ComponentLink2URL=http://digikey.com/product-detail/en/molex/0022272031/WM4112-ND/1130578, Connector Type=Header, Contact Finish - Mating=Tin, Contact Finish - Post=Tin, Contact Finish Thickness - Mating="100.0µin (2.54µm)", Contact Length - Mating="0.295\" (7.49mm)", Contact Length - Post="0.140\" (3.56mm)", Contact Material=Brass, Contact Shape=Square, Contact Type="Male Pin", Fastening Type="Friction Lock", Insulation Height="0.461\" (11.70mm)", Insulation Material="Polyamide (PA), Nylon", LastUpdated="2/3/2020 5:11:43 PM", Lifecycle Status=Active, Minimum Order=1, Mounting Type="Through Hole", Number of Positions=3, Number of Positions Loaded=All, Number of Rows=1, Overall Contact Length="0.560\" (14.22mm)", Packaging=Bulk, Part Number=0022272031, Part Status=Active, Pitch - Mating="0.100\" (2.54mm)", Price=0.37, Series="KK 6410", Shrouding="Shrouded - 1 Wall", Style="Board to Cable/Wire", Supplier 1=DigiKey, Termination=Solder
J3: "CONN HEADER VERT 8POS 2.54MM", Insulation Color=Natural, Manufacturer=Molex, Material Flammability Rating="UL94 V-0", Supplier Part Number 1=WM4117-ND, ComponentLink1Description=Datasheet, ComponentLink1URL=https://www.molex.com/pdm_docs/sd/022272081_sd.pdf, ComponentLink2Description="DigiKey Link", ComponentLink2URL=http://digikey.com/product-detail/en/molex/0022272081/WM4117-ND/1130583, Connector Type=Header, Contact Finish - Mating=Tin, Contact Finish - Post=Tin, Contact Finish Thickness - Mating="100.0µin (2.54µm)", Contact Length - Mating="0.295\" (7.49mm)", Contact Length - Post="0.140\" (3.56mm)", Contact Material=Brass, Contact Shape=Square, Contact Type="Male Pin", Fastening Type="Friction Lock", Insulation Height="0.461\" (11.70mm)", Insulation Material="Polyamide (PA), Nylon", LastUpdated="2/3/2020 5:11:43 PM", Lifecycle Status=Active, Minimum Order=1, Mounting Type="Through Hole", Number of Positions=8, Number of Positions Loaded=All, Number of Rows=1, Overall Contact Length="0.560\" (14.22mm)", Packaging=Bulk, Part Number=0022272081, Part Status=Active, Pitch - Mating="0.100\" (2.54mm)", Price=0.60, Series="KK 6410", Shrouding="Shrouded - 1 Wall", Style="Board to Cable/Wire", Supplier 1=DigiKey, Termination=Solder
J4: "CONN HEADER VERT 5POS 2.54MM", Insulation Color=Natural, Manufacturer=Molex, Material Flammability Rating="UL94 V-0", Supplier Part Number 1=WM4114-ND, ComponentLink1Description=Datasheet, ComponentLink1URL=https://www.molex.com/pdm_docs/sd/022272051_sd.pdf, ComponentLink2Description="DigiKey Link", ComponentLink2URL=http://digikey.com/product-detail/en/molex/0022272051/WM4114-ND/1130580, Connector Type=Header, Contact Finish - Mating=Tin, Contact Finish - Post=Tin, Contact Finish Thickness - Mating="100.0µin (2.54µm)", Contact Length - Mating="0.295\" (7.49mm)", Contact Length - Post="0.140\" (3.56mm)", Contact Material=Brass, Contact Shape=Square, Contact Type="Male Pin", Fastening Type="Friction Lock", Insulation Height="0.461\" (11.70mm)", Insulation Material="Polyamide (PA), Nylon", LastUpdated="2/3/2020 5:11:43 PM", Lifecycle Status=Active, Minimum Order=1, Mounting Type="Through Hole", Number of Positions=5, Number of Positions Loaded=All, Number of Rows=1, Overall Contact Length="0.560\" (14.22mm)", Packaging=Bulk, Part Number=0022272051, Part Status=Active, Pitch - Mating="0.100\" (2.54mm)", Price=0.46, Series="KK 6410", Shrouding="Shrouded - 1 Wall", Style="Board to Cable/Wire", Supplier 1=DigiKey, Termination=Solder
J5: "CONN HDR 8/10P 0.1 GOLD PCB 6PC", Insulation Color=Black, Manufacturer="Schmartboard, Inc.", Supplier Part Number 1=1988-1036-ND, ComponentLink1Description=Datasheet, ComponentLink1URL=http://schmartboard.com/content/Brochures/920-0088-01.pdf, ComponentLink2Description="DigiKey Link", ComponentLink2URL=http://digikey.com/product-detail/en/schmartboard-inc/920-0088-01/1988-1036-ND/9559319, Connector Type=Header, Contact Finish - Mating=Gold, Contact Finish - Post=Gold, Contact Length - Post="0.413\" (10.50mm)", Contact Type="Female Socket", Fastening Type=Push-Pull, Insulation Height="0.335\" (8.51mm)", LastUpdated="2/3/2020 5:11:42 PM", Lifecycle Status=Active, Minimum Order=1, Mounting Type="Through Hole", Number of Positions="6, 8, 10", Number of Positions Loaded=All, Number of Rows=1, Packaging=Bulk, Part Number=920-0088-01, Part Status=Active, Pitch - Mating="0.100\" (2.54mm)", Price=5.00, Series=-, Style="Board to Board", Supplier 1=DigiKey, Termination=Solder
J6: "TERM BLK 2P SIDE ENT 2.54MM PCB", Color=Green, Current=10A, Manufacturer="TE Connectivity AMP Connectors", Supplier Part Number 1=A98333-ND, Voltage=150V, ComponentLink1Description=Datasheet, ComponentLink1URL=https://www.te.com/commerce/DocumentDelivery/DDEController?Action=srchrtrv&DocNm=282834&DocType=Customer+Drawing&DocLang=English, ComponentLink2Description="DigiKey Link", ComponentLink2URL=http://digikey.com/product-detail/en/te-connectivity-amp-connectors/282834-2/A98333-ND/1150135, LastUpdated="2/3/2020 5:11:45 PM", Lifecycle Status=Active, Mating Orientation="Horizontal with Board", Minimum Order=1, Mounting Type="Through Hole", Number of Levels=1, Packaging=Bulk, Part Number=282834-2, Part Status=Active, Pitch="0.100\" (2.54mm)", Positions Per Level=2, Price=0.88, Series=Buchanan, Supplier 1=DigiKey, Wire Gauge="16-30 AWG", Wire Termination="Screw - Rising Cage Clamp"
L1: library part CMP-07248-000050-1, "FIXED IND 15UH 1.9A 95.8MOHM SMD", Case/Package=Nonstandard, Current Rating=1.9A, DC Resistance (DCR)=95.8mR, Inductance=15uH, Inductance Tolerance=20%, Max Operating Temperature=125°C, Min Operating Temperature=-40°C, Package Quantity=1000, Resistor Type=Wirewound, Saturation Current=2.3A, Self Resonant Frequency=13MHz, Test Frequency=100kHz, Core Material=Ferrite, DC Current=1.9A, Depth=6.2mm, Height=4.5mm, Height - Seated (Max)=0.177inch, Length=6mm, Max DC Current=1.9A, Military Standard=Not, Mount="Surface Mount", Number of Pins=2, Packaging="Tape and Reel", REACH SVHC="No SVHC", RMS Current (Irms)=1.9A, Series=SRN6045, Shielding=Shielded, Termination=SMD/SMT, Tolerance=20%, Weight=0.027725oz, Width=6mm
Q1: "MOSFET (N-Channel)", Manufacturer_Name=Infineon, Mouser Part Number=942-IRLML6246TRPBF, Arrow Part Number=IRLML6246TRPBF, Arrow Price/Stock=https://www.arrow.com/en/products/irlml6246trpbf/infineon-technologies-ag?region=nac, Datasheet Link=https://www.mouser.com/datasheet/2/196/irlml6246pbf-1228486.pdf, Height=1.12mm, Manufacturer_Part_Number=IRLML6246TRPBF, Mouser Price/Stock=https://www.mouser.co.uk/ProductDetail/Infineon-IR/IRLML6246TRPBF?qs=9%252BKlkBgLFf2CL0BDviDAhg%3D%3D
R1: library part RC0603FR-07169KL, "RES SMD 169K OHM 1% 1/10W 0603", Device Package="0603 (1608 Metric)", Manufacturer=Yageo, Operating Temperature="-55°C ~ 155°C", Power (Watts)="0.1W, 1/10W", Supplier Device Package=0603, Supplier Part Number 1=311-169KHRCT-ND, Temperature Coefficient=±100ppm/°C, Tolerance=±1%, ComponentLink1Description=Datasheet, ComponentLink1URL=https://www.yageo.com/upload/media/product/productsearch/datasheet/rchip/PYu-RC_Group_51_RoHS_L_10.pdf, ComponentLink2Description="DigiKey Link", ComponentLink2URL=http://digikey.com/product-detail/en/yageo/RC0603FR-07169KL/311-169KHRCT-ND/729926, Composition="Thick Film", Features="Moisture Resistant", Height - Seated (Max)="0.022\" (0.55mm)", LastUpdated="2/19/2020 6:28:06 AM", Lifecycle Status=Active, Minimum Order=1, Number of Terminations=2, Package / Case="0603 (1608 Metric)", Packaging=CutTape, Part Number=RC0603FR-07169KL, Part Status=Active, Price=0.10, Resistance="169 kΩ", Series=RC, Size / Dimension="0.063\" L x 0.031\" W (1.60mm x 0.80mm)", Supplier 1=DigiKey
R2: library part AC0603FR-0710K2L, "RES SMD 10.2K OHM 1% 1/10W 0603", Device Package="0603 (1608 Metric)", Manufacturer=Yageo, Operating Temperature="-55°C ~ 155°C", Power (Watts)="0.1W, 1/10W", Ratings=AEC-Q200, Supplier Device Package=0603, Supplier Part Number 1=YAG5317CT-ND, Temperature Coefficient=±100ppm/°C, Tolerance=±1%, ComponentLink1Description=Datasheet, ComponentLink1URL=https://www.yageo.com/upload/media/product/productsearch/datasheet/rchip/PYu-AC_51_RoHS_L_7.pdf, ComponentLink2Description="DigiKey Link", ComponentLink2URL=http://digikey.com/product-detail/en/yageo/AC0603FR-0710K2L/YAG5317CT-ND/7063660, Composition="Thick Film", Features="Automotive AEC-Q200, Moisture Resistant", Height - Seated (Max)="0.022\" (0.55mm)", LastUpdated="2/19/2020 6:28:06 AM", Lifecycle Status=Active, Minimum Order=1, Number of Terminations=2, Package / Case="0603 (1608 Metric)", Packaging=CutTape, Part Number=AC0603FR-0710K2L, Part Status=Active, Price=0.10, Resistance="10.2 kΩ", Series=AC, Size / Dimension="0.063\" L x 0.031\" W (1.60mm x 0.80mm)", Supplier 1=DigiKey
R3: library part CR0603-FX-1581ELF, "RES SMD 1.58K OHM 1% 1/10W 0603", Device Package="0603 (1608 Metric)", Manufacturer="Bourns Inc.", Operating Temperature="-55°C ~ 155°C", Power (Watts)="0.1W, 1/10W", Supplier Device Package=0603, Supplier Part Number 1=CR0603-FX-1581ELFCT-ND, Temperature Coefficient=±100ppm/°C, Tolerance=±1%, ComponentLink1Description=Datasheet, ComponentLink1URL=https://www.bourns.com/docs/Product-Datasheets/CHPREZTR.pdf, ComponentLink2Description="DigiKey Link", ComponentLink2URL=http://digikey.com/product-detail/en/bourns-inc/CR0603-FX-1581ELF/CR0603-FX-1581ELFCT-ND/8601999, Composition="Thick Film", Features="Moisture Resistant", Height - Seated (Max)="0.022\" (0.55mm)", LastUpdated="2/19/2020 6:28:06 AM", Lifecycle Status=Active, Minimum Order=1, Number of Terminations=2, Package / Case="0603 (1608 Metric)", Packaging=TapeAndReel, Part Number=CR0603-FX-1581ELF, Part Status=Active, Price=0.01, Resistance="1.58 kΩ", Series=CR0603, Size / Dimension="0.063\" L x 0.031\" W (1.60mm x 0.80mm)", Supplier 1=DigiKey
R4: library part AC0603FR-0751KL, "RES SMD 51K OHM 1% 1/10W 0603", Device Package="0603 (1608 Metric)", Manufacturer=Yageo, Operating Temperature="-55°C ~ 155°C", Power (Watts)="0.1W, 1/10W", Ratings=AEC-Q200, Supplier Device Package=0603, Supplier Part Number 1=YAG3616CT-ND, Temperature Coefficient=±100ppm/°C, Tolerance=±1%, ComponentLink1Description=Datasheet, ComponentLink1URL=https://www.yageo.com/upload/media/product/productsearch/datasheet/rchip/PYu-AC_51_RoHS_L_7.pdf, ComponentLink2Description="DigiKey Link", ComponentLink2URL=http://digikey.com/product-detail/en/yageo/AC0603FR-0751KL/YAG3616CT-ND/6006465, Composition="Thick Film", Features="Automotive AEC-Q200, Moisture Resistant", Height - Seated (Max)="0.022\" (0.55mm)", LastUpdated="2/19/2020 6:28:06 AM", Lifecycle Status=Active, Minimum Order=1, Number of Terminations=2, Package / Case="0603 (1608 Metric)", Packaging=CutTape, Part Number=AC0603FR-0751KL, Part Status=Active, Price=0.10, Resistance="51 kΩ", Series=AC, Size / Dimension="0.063\" L x 0.031\" W (1.60mm x 0.80mm)", Supplier 1=DigiKey
R5: library part CR0603-FX-3092ELF, "RES SMD 30.9K OHM 1% 1/10W 0603", Device Package="0603 (1608 Metric)", Manufacturer="Bourns Inc.", Operating Temperature="-55°C ~ 155°C", Power (Watts)="0.1W, 1/10W", Supplier Device Package=0603, Supplier Part Number 1=CR0603-FX-3092ELFCT-ND, Temperature Coefficient=±100ppm/°C, Tolerance=±1%, ComponentLink1Description=Datasheet, ComponentLink1URL=https://www.bourns.com/docs/Product-Datasheets/CHPREZTR.pdf, ComponentLink2Description="DigiKey Link", ComponentLink2URL=http://digikey.com/product-detail/en/bourns-inc/CR0603-FX-3092ELF/CR0603-FX-3092ELFCT-ND/8602027, Composition="Thick Film", Features="Moisture Resistant", Height - Seated (Max)="0.022\" (0.55mm)", LastUpdated="2/19/2020 6:28:06 AM", Lifecycle Status=Active, Minimum Order=1, Number of Terminations=2, Package / Case="0603 (1608 Metric)", Packaging=TapeAndReel, Part Number=CR0603-FX-3092ELF, Part Status=Active, Price=0.01, Resistance="30.9 kΩ", Series=CR0603, Size / Dimension="0.063\" L x 0.031\" W (1.60mm x 0.80mm)", Supplier 1=DigiKey
R6: library part AC0603FR-07820RL, "RES SMD 820 OHM 1% 1/10W 0603", Device Package="0603 (1608 Metric)", Manufacturer=Yageo, Operating Temperature="-55°C ~ 155°C", Power (Watts)="0.1W, 1/10W", Ratings=AEC-Q200, Supplier Device Package=0603, Supplier Part Number 1=YAG3632CT-ND, Temperature Coefficient=±100ppm/°C, Tolerance=±1%, ComponentLink1Description=Datasheet, ComponentLink1URL=https://www.yageo.com/upload/media/product/productsearch/datasheet/rchip/PYu-AC_51_RoHS_L_7.pdf, ComponentLink2Description="DigiKey Link", ComponentLink2URL=http://digikey.com/product-detail/en/yageo/AC0603FR-07820RL/YAG3632CT-ND/6006481, Composition="Thick Film", Features="Automotive AEC-Q200, Moisture Resistant", Height - Seated (Max)="0.022\" (0.55mm)", LastUpdated="2/19/2020 6:28:06 AM", Lifecycle Status=Active, Minimum Order=1, Number of Terminations=2, Package / Case="0603 (1608 Metric)", Packaging=CutTape, Part Number=AC0603FR-07820RL, Part Status=Active, Price=0.10, Resistance="820 Ω", Series=AC, Size / Dimension="0.063\" L x 0.031\" W (1.60mm x 0.80mm)", Supplier 1=DigiKey
R7: library part AC0603JR-07390RL, "RES SMD 390 OHM 5% 1/10W 0603", Device Package="0603 (1608 Metric)", Manufacturer=Yageo, Operating Temperature="-55°C ~ 155°C", Power (Watts)="0.1W, 1/10W", Ratings=AEC-Q200, Supplier Device Package=0603, Supplier Part Number 1=YAG3668CT-ND, Temperature Coefficient=±100ppm/°C, Tolerance=±5%, ComponentLink1Description=Datasheet, ComponentLink1URL=https://www.yageo.com/upload/media/product/productsearch/datasheet/rchip/PYu-AC_51_RoHS_L_7.pdf, ComponentLink2Description="DigiKey Link", ComponentLink2URL=http://digikey.com/product-detail/en/yageo/AC0603JR-07390RL/YAG3668CT-ND/6006517, Composition="Thick Film", Features="Automotive AEC-Q200, Moisture Resistant", Height - Seated (Max)="0.022\" (0.55mm)", LastUpdated="2/19/2020 6:28:06 AM", Lifecycle Status=Active, Minimum Order=1, Number of Terminations=2, Package / Case="0603 (1608 Metric)", Packaging=CutTape, Part Number=AC0603JR-07390RL, Part Status=Active, Price=0.10, Resistance="390 Ω", Series=AC, Size / Dimension="0.063\" L x 0.031\" W (1.60mm x 0.80mm)", Supplier 1=DigiKey
R8 R9: library part AC0603FR-07330RL, "RES SMD 330 OHM 1% 1/10W 0603", Device Package="0603 (1608 Metric)", Manufacturer=Yageo, Operating Temperature="-55°C ~ 155°C", Power (Watts)="0.1W, 1/10W", Ratings=AEC-Q200, Supplier Device Package=0603, Supplier Part Number 1=YAG3595CT-ND, Temperature Coefficient=±100ppm/°C, Tolerance=±1%, ComponentLink1Description=Datasheet, ComponentLink1URL=https://www.yageo.com/upload/media/product/productsearch/datasheet/rchip/PYu-AC_51_RoHS_L_7.pdf, ComponentLink2Description="DigiKey Link", ComponentLink2URL=http://digikey.com/product-detail/en/yageo/AC0603FR-07330RL/YAG3595CT-ND/6006444, Composition="Thick Film", Features="Automotive AEC-Q200, Moisture Resistant", Height - Seated (Max)="0.022\" (0.55mm)", LastUpdated="2/19/2020 6:28:06 AM", Lifecycle Status=Active, Minimum Order=1, Number of Terminations=2, Package / Case="0603 (1608 Metric)", Packaging=CutTape, Part Number=AC0603FR-07330RL, Part Status=Active, Price=0.10, Resistance="330 Ω", Series=AC, Size / Dimension="0.063\" L x 0.031\" W (1.60mm x 0.80mm)", Supplier 1=DigiKey
R10 R11: library part AC0603FR-0710KL, "RES SMD 10K OHM 1% 1/10W 0603", Device Package="0603 (1608 Metric)", Manufacturer=Yageo, Operating Temperature="-55°C ~ 155°C", Power (Watts)="0.1W, 1/10W", Ratings=AEC-Q200, Supplier Device Package=0603, Supplier Part Number 1=311-10KLDCT-ND, Temperature Coefficient=±100ppm/°C, Tolerance=±1%, ComponentLink1Description=Datasheet, ComponentLink1URL=https://www.yageo.com/upload/media/product/productsearch/datasheet/rchip/PYu-AC_51_RoHS_L_7.pdf, ComponentLink2Description="DigiKey Link", ComponentLink2URL=http://digikey.com/product-detail/en/yageo/AC0603FR-0710KL/311-10KLDCT-ND/2828135, Composition="Thick Film", Features="Automotive AEC-Q200, Moisture Resistant", Height - Seated (Max)="0.022\" (0.55mm)", LastUpdated="2/19/2020 6:28:06 AM", Lifecycle Status=Active, Minimum Order=1, Number of Terminations=2, Package / Case="0603 (1608 Metric)", Packaging=CutTape, Part Number=AC0603FR-0710KL, Part Status=Active, Price=0.10, Resistance="10 kΩ", Series=AC, Size / Dimension="0.063\" L x 0.031\" W (1.60mm x 0.80mm)", Supplier 1=DigiKey
R12: library part CMP-07234-000013-1, "POT 10K OHM 1/20W CARBON LINEAR", Manufacturer="Bourns Inc.", Package=PTV09A-4, Power Rating=0.05W, Resistance=10kΩ, Temperature="-10°C to +50°C", Temperature Range High=+50°C, Temperature Range Low=-10°C, Tolerance=20%, Voltage Rating=50V, Automotive=No, Category=Res, ComponentLink2Description=Datasheet, ComponentLink2URL=https://www.bourns.com/docs/product-datasheets/ptv09.pdf?sfvrsn=5e1089f1_12, Composition=Carbon, Device Class L1="Passive Components", Device Class L2=Resistors, Device Class L3="Variable Resistors and Potentiometers", Digikey Description="POT 10K OHM 1/20W CARBON LINEAR", Height=20.5mm, Lead Free=Yes, Manufacturer Part Number=PTV09A-4020U-B103, Mouser Description="Potentiometers 10K LINEAR 20%", Octopart=https://octopart.com/ptv09a-4020u-b103-bourns-1878033, RoHS=TRUE, Series=PTV09
R13 R16: library part AC0603FR-07100KL, "RES SMD 100K OHM 1% 1/10W 0603", Device Package="0603 (1608 Metric)", Manufacturer=Yageo, Operating Temperature="-55°C ~ 155°C", Power (Watts)="0.1W, 1/10W", Ratings=AEC-Q200, Supplier Device Package=0603, Supplier Part Number 1=311-100KLDCT-ND, Temperature Coefficient=±100ppm/°C, Tolerance=±1%, ComponentLink1Description=Datasheet, ComponentLink1URL=https://www.yageo.com/upload/media/product/productsearch/datasheet/rchip/PYu-AC_51_RoHS_L_7.pdf, ComponentLink2Description="DigiKey Link", ComponentLink2URL=http://digikey.com/product-detail/en/yageo/AC0603FR-07100KL/311-100KLDCT-ND/2828134, Composition="Thick Film", Features="Automotive AEC-Q200, Moisture Resistant", Height - Seated (Max)="0.022\" (0.55mm)", LastUpdated="2/19/2020 6:28:06 AM", Lifecycle Status=Active, Minimum Order=1, Number of Terminations=2, Package / Case="0603 (1608 Metric)", Packaging=CutTape, Part Number=AC0603FR-07100KL, Part Status=Active, Price=0.10, Resistance="100 kΩ", Series=AC, Size / Dimension="0.063\" L x 0.031\" W (1.60mm x 0.80mm)", Supplier 1=DigiKey
R14: library part AC0603FR-070RL, "RES SMD 0 OHM JUMPER 1/10W 0603", Device Package="0603 (1608 Metric)", Manufacturer=Yageo, Operating Temperature="-55°C ~ 155°C", Power (Watts)="0.1W, 1/10W", Ratings=AEC-Q200, Supplier Device Package=0603, Supplier Part Number 1=311-0.0LDCT-ND, Tolerance=Jumper, ComponentLink1Description=Datasheet, ComponentLink1URL=https://www.yageo.com/upload/media/product/productsearch/datasheet/rchip/PYu-AC_51_RoHS_L_7.pdf, ComponentLink2Description="DigiKey Link", ComponentLink2URL=http://digikey.com/product-detail/en/yageo/AC0603FR-070RL/311-0.0LDCT-ND/2828133, Composition="Thick Film", Features="Automotive AEC-Q200, Moisture Resistant", Height - Seated (Max)="0.022\" (0.55mm)", LastUpdated="2/19/2020 6:28:06 AM", Lifecycle Status=Active, Minimum Order=1, Number of Terminations=2, Package / Case="0603 (1608 Metric)", Packaging=CutTape, Part Number=AC0603FR-070RL, Part Status=Active, Price=0.10, Resistance="0 Ω", Series=AC, Size / Dimension="0.063\" L x 0.031\" W (1.60mm x 0.80mm)", Supplier 1=DigiKey
R15: library part AC0603FR-0710RL, "RES SMD 10 OHM 1% 1/10W 0603", Device Package="0603 (1608 Metric)", Manufacturer=Yageo, Operating Temperature="-55°C ~ 155°C", Power (Watts)="0.1W, 1/10W", Ratings=AEC-Q200, Supplier Device Package=0603, Supplier Part Number 1=311-10LDCT-ND, Temperature Coefficient=±200ppm/°C, Tolerance=±1%, ComponentLink1Description=Datasheet, ComponentLink1URL=https://www.yageo.com/upload/media/product/productsearch/datasheet/rchip/PYu-AC_51_RoHS_L_7.pdf, ComponentLink2Description="DigiKey Link", ComponentLink2URL=http://digikey.com/product-detail/en/yageo/AC0603FR-0710RL/311-10LDCT-ND/2828514, Composition="Thick Film", Features="Automotive AEC-Q200, Moisture Resistant", Height - Seated (Max)="0.022\" (0.55mm)", LastUpdated="2/19/2020 6:28:06 AM", Lifecycle Status=Active, Minimum Order=1, Number of Terminations=2, Package / Case="0603 (1608 Metric)", Packaging=TapeAndReel, Part Number=AC0603FR-0710RL, Part Status=Active, Price=0.01, Resistance="10 Ω", Series=AC, Size / Dimension="0.063\" L x 0.031\" W (1.60mm x 0.80mm)", Supplier 1=DigiKey
R17: library part CMP-2003-00708-1, "ERJ-L08KF10CV", Manufacturer=Panasonic, Part Number=ERJ-L08KF10CV
R18: library part CR0603-FX-3603ELF, "RES SMD 360K OHM 1% 1/10W 0603", Device Package="0603 (1608 Metric)", Manufacturer="Bourns Inc.", Operating Temperature="-55°C ~ 155°C", Power (Watts)="0.1W, 1/10W", Supplier Device Package=0603, Supplier Part Number 1=CR0603-FX-3603ELFCT-ND, Temperature Coefficient=±100ppm/°C, Tolerance=±1%, ComponentLink1Description=Datasheet, ComponentLink1URL=https://www.bourns.com/docs/Product-Datasheets/CHPREZTR.pdf, ComponentLink2Description="DigiKey Link", ComponentLink2URL=http://digikey.com/product-detail/en/bourns-inc/CR0603-FX-3603ELF/CR0603-FX-3603ELFCT-ND/8602033, Composition="Thick Film", Features="Moisture Resistant", Height - Seated (Max)="0.022\" (0.55mm)", LastUpdated="2/19/2020 6:28:06 AM", Lifecycle Status=Active, Minimum Order=1, Number of Terminations=2, Package / Case="0603 (1608 Metric)", Packaging=TapeAndReel, Part Number=CR0603-FX-3603ELF, Part Status=Active, Price=0.01, Resistance="360 kΩ", Series=CR0603, Size / Dimension="0.063\" L x 0.031\" W (1.60mm x 0.80mm)", Supplier 1=DigiKey
R19: library part CPF0603B4K3E1, "RES SMD 4.3K OHM 0.1% 1/16W 0603", Device Package="0603 (1608 Metric)", Manufacturer="TE Connectivity Passive Product", Operating Temperature="-55°C ~ 155°C", Power (Watts)="0.063W, 1/16W", Supplier Device Package=0603, Supplier Part Number 1=A103104CT-ND, Temperature Coefficient=±25ppm/°C, Tolerance=±0.1%, ComponentLink1Description=Datasheet, ComponentLink1URL=https://www.te.com/commerce/DocumentDelivery/DDEController?Action=srchrtrv&DocNm=1773200&DocType=DS&DocLang=English, ComponentLink2Description="DigiKey Link", ComponentLink2URL=http://digikey.com/product-detail/en/te-connectivity-passive-product/CPF0603B4K3E1/A103104CT-ND/2728657, Composition="Thin Film", Height - Seated (Max)="0.022\" (0.55mm)", LastUpdated="2/19/2020 6:28:06 AM", Lifecycle Status=Active, Minimum Order=1, Number of Terminations=2, Package / Case="0603 (1608 Metric)", Packaging=TapeAndReel, Part Number=CPF0603B4K3E1, Part Status=Active, Price=0.12, Resistance="4.3 kΩ", Series="CPF, Neohm", Size / Dimension="0.061\" L x 0.031\" W (1.55mm x 0.80mm)", Supplier 1=DigiKey
U1: library part CMP-0323-00201-3, "Buck Step Down Regulator with 3.5 to 28 V Input and 0.8 to 25 V Output, -40 to 150 degC, 8-Pin SOIC (D), Green (RoHS & no Sb/Br)", Manufacturer="Texas Instruments", Rating=Catalog, Switch Current Limit(Typ)(A)=2.3, Code_JEDEC=MS-012AA, ComponentLink1Description=Datasheet, ComponentLink1URL=http://www.ti.com/general/docs/lit/getliterature.tsp?genericPartNumber=TPS54232&fileType=pdf, ComponentLink2Description="Package Specification", ComponentLink2URL=http://www.ti.com/litv/pdf/msoi002j, ComponentLink3Description="URL Link1", ComponentLink3URL="Samples URL:http://www.ti.com/product/tps54611#samples", DatasheetVersion=SLVS876B, Duty Cycle(Max)(%)=90, Eco-Plan="Green (RoHS & no Sb/Br)", Iout(Max)(A)=2, Iq(Typ)(mA)=0.11, Mounting Technology="Surface Mount", PackageDescription="8-Pin Plastic Small Outline Integrated Circuit, 4.9 x 3.9 mm, Pitch 1.27 mm Pitch", PackageReference=D0008A, PackageVersion="revM, Jun-2011", PartNumber=TPS54232DR, Regulated Outputs(#)=1, SubFamily="Step-Down Regulator", Topology=Buck, Vin(Max)(V)=28, Vin(Min)(V)=3.5, Vout(Max)(V)=25, Vout(Min)(V)=0.8

## Via types
v1: diameter 25, hole 10, Top Layer to Bottom Layer, 27 vias
v2: diameter 20, hole 10, Top Layer to Bottom Layer, 8 vias

## Nets (pads, with @x,y where several pads share a name; then routed paths per layer and width w, separated by ;. In a path a pad name is that pad's centre, name@x,y a point inside that pad or via, vN(x,y) a via of type N, cw(c..) or ccw(c..) an arc to the next point about the centre after c; other vN are vias at no path point)
3V3: J3.2 J5.4 | length 2999.9
  Int2 (PWR) w30: J5.4 110.08,1895.08 35,1820 35,690 70,655 1000,655 1435.67,219.33 1435.67,164.33 J3.2
5V0: C14.2 IC1.6 J3.1 J5.5 R10.1 R11.1 R12.1 | length 3074.2
  Top Layer w15: R10.1 R11.1 429.04,786.55 429.04,700.96 v2(430,700)
  Int2 (PWR) w30: J5.5 115.08,1795.08 90,1770 90,717.57 107.57,700 v2(430,700) 1019.68,700 1545,174.68 J3.1
  other v2: 1560,2095 1625,2095
ADC0: J5.9 R12.2 | length 2027.8
  Bottom Layer w15: J5.9 217.08,1302.16 257.16,1302.16 1465,2510 1599.41,2510 R12.2
ADC1: C15.2 IC1.4 J5.10 R18.2 | length 1860.6
  Top Layer w15: J5.10 1125.08,1195.08 1475,1545 v2(1475,1695) ; v2(1475,1791.35) 1471.69,1794.66 C15.2 1471.2,1841.08 1471.2,1915.1 R18.2 1470.71,1917.56 1480,1926.85 IC1.4
  Bottom Layer w15: v2(1475,1695) v2(1475,1791.35)
ADC2: J3.3 J5.11 | length 1535.9
  Top Layer w15: J5.11 424.61,1095.08 1345,174.68 J3.3
ADC3: J3.4 J5.12 | length 1394.5
  Top Layer w15: J5.12 424.61,995.08 1245,174.68 J3.4
BOOT: C1.2 U1.1 | length 130.7